# Altium PCB chip.PcbDoc (part 2 of 2)
Units mil, origin at the board's own origin, x right, y up, seen from the top; angles counter-clockwise.
Board outline 3130 x 2410 mil, 2 copper layers (Top Layer, Bottom Layer); 96 components, 117 nets, 462 pads, 172 vias.
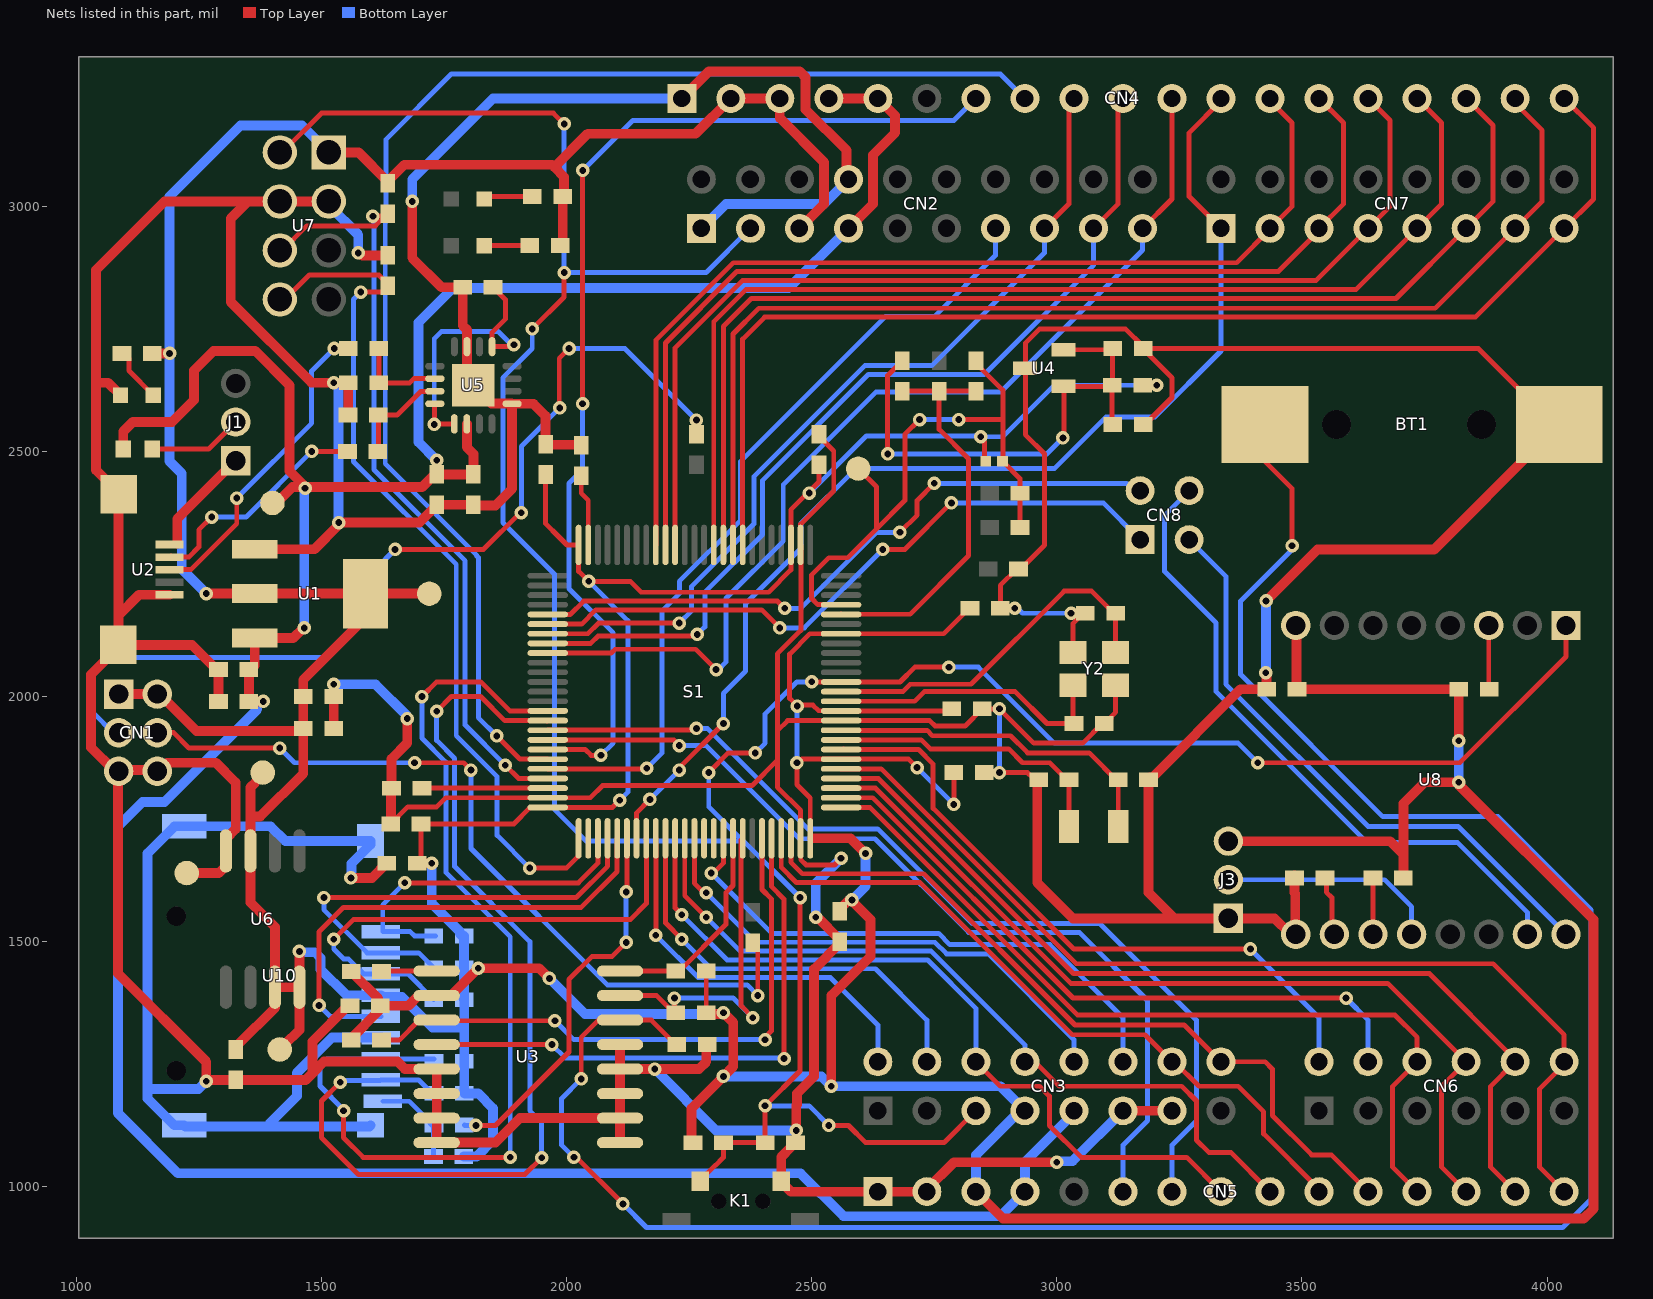
[diagram p2: the nets of this part, all layers, seen from the top]

## Via types
v1: diameter 27.56, hole 13.78, Top Layer to Bottom Layer, 172 vias

## Nets (pads, with @x,y where several pads share a name; then routed paths per layer and width w, separated by ;. In a path a pad name is that pad's centre, name@x,y a point inside that pad or via, vN(x,y) a via of type N, cw(c..) or ccw(c..) an arc to the next point about the centre after c; other vN are vias at no path point) (continued)
GND: BT1.2 C1.1 C2.2 C3.2 C4.2 C5.2 C6.1 C7.1 C8.1 C9.2 C10.1 C11.1 C12.1 C13.1 C14.2 C15.2 C16.2 C17.1 C18.2 C19.2 C20.1 C21.1 C22.1 C23.1 C24.1 C25.1 C26.1 C27.1 C28.1 C31.1 C32.2 CN1.5 CN1.6 CN2.1 CN2.8 CN3.11 CN3.13 CN4.1 CN5.1 CN5.2 J3.1 K1.D LED1.2 R15.1 R17.1 R24.2 S1.10 S1.27 S1.74 S1.99 TP6.1 U1.1 U2.5 U2.6 U2.7 U3.5 U3.6 U3.7 U3.8 U3.9 U3.10 U3.11 U3.12 U3.13 U4.3 U5.3 U5.13 U5.17 U6.4 U7.3 U7.4 U8.15 U10.6 U10.10 U10.11 U10.12 U10.13 Y2.2 Y2.4 | length 21266.3
  Top Layer w10: U6.4@1305,1665 U6.4@1305,1685 ; C23.1@1642.02,1740.92 1676.1,1775 1735,1775 1753.46,1793.46 S1.74@1961.57,1793.46 2048.46,1793.46 2073.22,1818.22 2378.22,1818.22 2430,1870 ; C19.2@1784.74,2835 C19.2@1786.9,2835 ; C10.1@1810,2390.12 C10.1@1810.12,2390 ; C6.1@2285.93,1290 C6.1@2287.01,1290 ; C22.1@2515,2535 2515,2531 2545,2501 2545,2419.37 2477.32,2351.7 S1.27@2477.32,2309.21 2478,2308.53 2478,2135.13 2430,2087.13 2430,1930 ; v1(2560,1670) 2546.45,1656.45 2488.55,1656.45 2477.67,1667.33 2477.67,1710.44 S1.99@2477.32,1710.79 2477.32,1767.68 2430,1815 2430,1870 ; C26.1@2848.1,1975 2813.1,1940 2751.74,1940 2740.8,1950.94 S1.10@2560,1950.94 2450.94,1950.94 2430,1930 ; C25.1@2852,1845 v1(2883,1845) v1@2887,1845 ; C26.1@2853.71,1975 v1(2883,1975) 2953,1905 3053,1905 3093,1945 C17.1@3097,1945 3101,1945 3111,1955 3111,1959 3120,1968 Y2.4@3120,2022.99 ; C27.1@2885,2175.5 C27.1@2885,2180 2885,2227 2918,2260 R15.1@2922,2260 2926,2260 2975,2309 2975,2495 2935.86,2534.14 2935.86,2720.86 2965,2750 3140,2750 C7.1@3175,2715 ; v1@2887,1838 v1@2887,1845 ; C27.1@2888,2180 v1(2914,2180) ; R15.1@2921.61,2255 R15.1@2926.61,2260 ; C13.1@2950,1835 2940,1845 v1@2887,1845 ; C13.1@2963,1830 C13.1@2968,1830 ; v1(3029,2170) 3053.58,2170 C20.1@3053.79,2169.79 ; Y2.2@3033.39,2090 3033.39,2149.39 C20.1@3053.79,2169.79 ; C20.1@3058,2170 3054,2170 C20.1@3053.79,2169.79 ; C20.1@3058.5,2169.75 3058,2169.75 C20.1@3053.79,2169.79 ; C7.1@3176,2710 3860,2710 4004,2566 4004,2518 BT1.2@4004,2505 ; C8.1@3180,2550 3185,2555 3185,2560 3235,2610 3235,2650 C7.1@3185,2700 ; J3.1@3347.48,1547.52 J3.1@3348.74,1546.26 ; 2430,1870 2430,1930
  Top Layer w20: U2.6@1078,2423.71 1077.28,2423.71 1059.25,2441.73 1059.25,2442.46 1040,2461.71 1040,2640 ; U2.7@1080,2095 1030,2045 1030,1896.26 CN1.5@1076.26,1850 ; U2.6@1085.67,2411.38 1085.67,2165.67 ; LED1.2@1090,2615 1065,2640 1040,2640 ; CN1.5@1091.26,1835 CN1.5@1088.74,1837.52 ; U2.5@1190,2207.64 1127.64,2207.64 1085.67,2165.67 ; TP6.1@1225,1640 1290.59,1640 1305,1654.41 U6.4@1305,1665 ; C3.2@1290,1990 C2.2@1290,2055 1286,2055 1236,2105 1235,2105 1234.72,2105.28 U2.7@1085.67,2105.28 1085.67,2165.67 ; U6.4@1305,1685 1305.92,1685.92 1305.92,1710.92 1325,1730 1325,1825 1285,1865 1185,1865 1170,1850 CN1.5@1076.26,1850 ; U1.1@1367.95,2300.55 1485.55,2300.55 1535,2350 v1(1535,2355) 1700.15,2355 C9.2@1734.75,2389.6 ; U7.3@1515,3010 U7.4@1415,3010 1350,3010 ; C5.2@1525,1935 C4.2@1525,2000 v1(1525,2025) ; C16.2@1554,2574.25 1554.5,2574.75 1554.5,2639.75 C15.2@1554.87,2640.13 ; C15.2@1555,2640.25 C15.2@1554.87,2640.13 ; C1.1@1558.23,1369.26 1554.23,1369.26 1481.5,1296.53 1481.5,1231.5 ; v1(1560,1630) 1603,1630 C21.1@1633,1660 ; v1(1575,2905) 1578.11,2905 1583.11,2900 R17.1@1635,2900 ; C23.1@1641.1,1740 1642.02,1740.92 1642.02,1812.23 C18.2@1642.95,1813.15 1642.95,1872.95 1675,1905 v1(1675,1955) ; v1(1685,3010) 1685,2895 1745,2835 C19.2@1788,2835 1788,2757.06 1796.8,2748.26 U5.3@1796.8,2713.74 1796.8,2648.2 U5.17@1810,2635 1847.09,2597.91 1888.03,2597.91 U5.13@1888.74,2597.2 ; C9.2@1735,2391.1 1809.02,2391.1 C10.1@1810,2390.12 ; C10.1@1809.88,2391.1 1809.88,2395.1 1814.98,2390 1855,2390 1888.74,2423.74 U5.13@1888.74,2597.2 ; C14.2@2030,2512.5 2028.81,2513.69 1958.49,2513.69 C28.1@1957.3,2514.88 1957.3,2572.7 1932.8,2597.2 U5.13@1888.74,2597.2 ; U3.9@2109.04,1090 U3.10@2109.04,1140 ; U3.13@2109.04,1290 U3.12@2109.04,1240 ; CN4.1@2235,3215.06 CN4.1@2235,3220 2290,3275 2475.76,3275 2487.47,3263.28 2487.47,3197.79 2570.73,3114.53 2570.73,3059.27 CN2.8@2575,3055 ; C6.1@2285.93,1290 2285,1289.07 2285,1255 2270,1240 v1(2180,1240) U3.12@2109.04,1240 ; C31.1@2458,1081.07 2437.96,1061.02 K1.D@2437.96,1011.34 2437.96,1009.37 2457.33,990 CN5.1@2635,990 CN5.2@2735,990 2735,995 2790,1050 v1(3000,1050) ; v1(2468.5,1115) 2468.5,1166.31 2470,1167.81 2470,1190 2505,1225 2505,1444 ; 2506.45,1445.45 2557.17,1496.17 C24.1@2557.17,1500.17 2557.17,1504.17 2511.33,1550 v1(2508.17,1550) ; C13.1@2960,1825 2960,1620.46 3032.94,1547.52 3239.76,1547.52 ; CN3.11@3135,1155 CN3.13@3235,1155 ; C11.1@3187,1830 3187,1600.28 3239.76,1547.52 ; C11.1@3190,1835 3195,1835 3375,2015 C32.2@3428,2015 3428,2047 v1(3426.38,2048.62) ; v1(3427,2195) 3532,2300 3770,2300 3988,2518 4004,2518 BT1.2@4032,2518 ; R24.2@3485,1635 R24.2@3485,1630 3485,1600 3486.26,1598.74 3486.26,1516.26 3475.44,1516.26 3444.18,1547.52 J3.1@3350,1547.52 3347.48,1547.52 3239.76,1547.52 ; 1040,2640 1040,2870 1180,3010 1350,3010 ; CN1.5@1076.26,1850 CN1.5@1088.74,1837.52 ; CN1.5@1088.74,1837.52 1085,1833.78 1085,1435 1265,1255 v1(1265,1215) 1268,1218 C12.1@1325,1218 1468,1218 1481.5,1231.5 ; 1350,3010 1315,2975 1315,2805 1479.75,2640.25 v1(1525,2640.25) 1525.13,2640.13 C15.2@1554.87,2640.13 ; 1481.5,1231.5 1505.22,1255.22 1654.78,1255.22 1670,1240 U3.5@1735,1240 U3.6@1735,1190 U3.7@1735,1140 U3.8@1735,1090 1855,1090 1905,1140 U3.10@2109.04,1140 ; U3.10@2109.04,1140 U3.11@2109.04,1190 U3.12@2109.04,1240
  Bottom Layer w10: v1(2883,1845) v1(2883,1975) ; v1@2915,2180 v1(2914,2180) 2920,2180 2930,2170 v1(3029,2170)
  Bottom Layer w20: v1(1265,1215) 1249.11,1199.11 1145.89,1199.11 1145,1200 ; 1395,1130 1450,1185 1450,1232.53 1521.75,1304.28 U10.6@1621.24,1304.28 ; U7.3@1515,3010 1515,3002.05 1575,2942.05 v1(1575,2905) ; v1(1525,2025) 1610,2025 1675,1960 v1(1675,1955) ; v1(1525,2640.25) 1535,2630.25 v1(1535,2355) ; v1(1560,1630) 1561.45,1631.45 1561.45,1659.19 1600.05,1697.8 U10.13@1600.05,1705.3 1426.3,1705.3 1396.3,1735.3 U10.12@1220.05,1735.3 1200.05,1735.3 1145,1680.25 1145,1200 ; U10.10@1600.05,1125.3 1597.97,1123.22 1222.13,1123.22 U10.11@1220.05,1125.3 1200.05,1125.3 1145,1180.35 1145,1200 ; v1(1685,3010) 1685,3055 1850,3220 CN4.1@2235,3220 ; v1(2180,1240) 2305,1115 v1(2468.5,1115) ; CN2.1@2275,2955 2325,3005 2525,3005 CN2.8@2575,3055 ; v1(2508.17,1550) 2508.17,1618.17 v1(2560,1670) ; v1(3000,1050) 3002.2,1052.2 3032.2,1052.2 CN3.11@3135,1155 ; v1(3426.38,2048.62) 3427,2049.25 v1(3427,2195)
IOREF: R9.2 R10.2 R11.2 S1.21 | length 819.8
  Top Layer w10: S1.21@2560,2168.26 2560.43,2167.83 2700.7,2167.83 2820,2287.13 2820,2485 2760,2545 R10.2@2760,2622.5 ; R11.2@2685,2623 R10.2@2760,2623 R9.2@2835,2623
MCU_RX: CN8.1 S1.56 | length 1368.8
  Top Layer w10: S1.56@1961.57,2147.8 2030.8,2147.8 2059.78,2176.78 2398.22,2176.78 v1(2435,2140) ; v1(2645,2300) 2690,2300 v1(2785,2395)
  Bottom Layer w10: v1(2435,2140) 2485,2140 v1(2645,2300) ; v1(2785,2395) 3095,2395 CN8.1@3167.5,2322.5
MCU_TX: CN8.2 S1.55 | length 1356.9
  Top Layer w10: S1.55@1961.57,2167.48 2007.48,2167.48 2034.78,2194.78 2430.22,2194.78 v1(2445,2180) ; v1(2680,2335) 2715,2370 2715,2400 v1(2750,2435)
  Bottom Layer w10: v1(2445,2180) 2477.87,2180 2632.87,2335 v1(2680,2335) ; v1(2750,2435) 3142.5,2435 3157.5,2420 3162.5,2425 CN8.2@3167.5,2420
NetBT1_1: BT1.1 C6.2 U3.14 | length 4740.5
  Top Layer w10: v1(2015,1060) 2020,1060 v1(2115,965) ; v1(2030,1220) 2030,1305 2065,1340 U3.14@2109.04,1340 2172.83,1340 2222.83,1290 C6.2@2225.01,1290 ; BT1.1@3425,2555 3425,2479 3480,2424 v1(3480,2307.5)
  Bottom Layer w10: v1(2015,1060) 1990,1085 1990,1180 v1(2030,1220) ; v1(2115,965) 2163,917 4032,917 4090,975 4090,1565 3900,1755 3665,1755 3375,2045 3375,2195 3480,2300 v1(3480,2307.5)
NetC14_1: C14.1 S1.49 | length 148.6
  Top Layer w10: C14.1@2030,2451.9 2030,2414.74 2044.25,2400.48 S1.49@2044.25,2309.21
NetC15_1: C15.1 R13.2 U5.6 | length 190.8
  Top Layer w10: R13.2@1617,2710 C15.1@1617,2640.25 1616,2639.25 1679.25,2639.25 1689.12,2649.12 1730.54,2649.12 U5.6@1731.26,2648.4
NetC16_1: C16.1 R12.2 U5.7 | length 211.3
  Top Layer w10: R12.2@1615,2500 1616,2501 C16.1@1616,2574.25 1654.25,2574.25 1702.08,2622.08 1730.54,2622.08 U5.7@1731.26,2622.8 ; R12.2@1620.12,2505.12 R12.2@1621,2504.25
NetC18_1: C18.1 S1.73 | length 259.2
  Top Layer w10: C18.1@1703.1,1815 C18.1@1704.95,1813.15 S1.73@1961.57,1813.15
NetC19_1: C19.1 U5.1 U5.8 U5.9 | length 640.4
  Top Layer w10: v1(1730,2555) v1@1730.63,2555.63 ; U5.8@1731.26,2597.2 1730.63,2596.57 v1@1730.63,2555.63 ; U5.9@1771,2569 U5.9@1771,2556.26 1770.37,2555.63 v1@1730.63,2555.63 ; C19.1@1850,2835 1875,2810 1875,2770 1848,2743 U5.1@1848,2713.74 1886.03,2713.74 1889.97,2717.68 v1(1892.68,2717.68)
  Bottom Layer w10: v1(1730,2555) 1730,2730 1745,2745 1860,2745 1884.65,2720.35 1890,2720.35 v1(1892.68,2717.68)
NetCN1_3: CN1.3 R6.1 | length 1939.8
  Top Layer w10: v1(1650,2300) 1830.32,2300 1905.32,2375 v1(1907.66,2375) ; v1(1986.25,2588.75) 1985,2590 1985,2690 v1(2005,2710) ; R6.1@2265,2535 v1(2265,2564)
  Bottom Layer w10: CN1.3@1085,1916.26 1025,1976.26 1025,2040 1065,2080 1505,2080 1610,2185 1610,2260 v1(1650,2300) ; v1(1907.66,2375) 1907.66,2510.16 v1(1986.25,2588.75) ; v1(2005,2710) 2119,2710 v1(2265,2564)
NetCN1_4: CN1.4 R5.2 | length 1658.6
  Top Layer w10: CN1.4@1165,1926.26 1198.28,1926.26 1229.54,1895 v1(1415,1895) ; v1(1690,1865) 1790,1865 v1(1805,1850) ; R5.2@2375,1493 R5.2@2377.5,1495.5 ; R5.2@2380,1498 R5.2@2377.5,1495.5 ; v1(2390,1390) 2390,1483 R5.2@2377.5,1495.5
  Bottom Layer w10: v1(1415,1895) 1445,1865 v1(1690,1865) ; v1(1805,1850) 1805,1690 2083.22,1411.78 2368.22,1411.78 v1(2390,1390)
NetF1_1: F1.1 J1.2 | length 195.2
  Top Layer w10: F1.1@1155,2505 1270,2505 J1.2@1325,2560 J1.2@1326.73,2561.73
NetJ3_2: J3.2 U8.18 | length 452.8
  Bottom Layer w10: J3.2@3350,1626.26 3668.74,1626.26 3723.74,1571.26 U8.18@3723.74,1515
NetLED1_1: LED1.1 R7.2 | length 113.9
  Top Layer w10: R7.2@1093,2700 1097,2700 1107,2690 1107,2665 LED1.1@1157,2615
NetLED2_1: LED2.1 R28.2 | length 93
  Top Layer w10: LED2.1@1832,2920 R28.2@1925,2920
NetLED3_1: LED3.1 R29.2 | length 100.1
  Top Layer w10: LED3.1@1832,3015 1837,3020 R29.2@1930,3020
NetR4_1: R4.1 U3.1 | length 112.8
  Top Layer w10: R4.1@1622.5,1439.26 1623.24,1440 U3.1@1735,1440
NetR23_2: R23.2 U8.3 | length 130.3
  Top Layer w10: U8.3@3881.22,2145 3881.22,2015.78 R23.2@3882,2015
NetR24_1: R24.1 U8.16 | length 116.7
  Top Layer w10: R24.1@3550,1625 3550,1601 3561,1590 3561,1520.26 U8.16@3566.26,1515
NetR25_1: R25.1 R26.1 U10.9 | length 188
  Bottom Layer w10: U10.9@1625.18,1174.42 1678.88,1174.42 1715.44,1137.86 1715.44,1135.95 1726.49,1124.9 1728.4,1124.9 R26.1@1728.4,1061.7
NetR27_1: R27.1 U8.17 | length 115
  Top Layer w10: U8.17@3645,1515 R27.1@3645,1630
OSC32_IN: C13.2 S1.8 Y1.1 | length 595
  Top Layer w10: S1.8@2560,1911.57 2723.43,1911.57 2741.78,1893.22 2901.78,1893.22 2930,1865 2986,1865 3021.5,1829.5 C13.2@3021.5,1826.5 ; C13.2@3021.5,1830 C13.2@3021.5,1831.5 ; Y1.1@3025,1735 C13.2@3025,1830
OSC32_OUT: C11.2 S1.9 Y1.2 | length 699.8
  Top Layer w10: S1.9@2560,1931.26 2560.35,1930.91 2735.37,1930.91 2746.28,1920 2905.51,1920 2940.51,1885 3066,1885 3125.39,1825.61 Y1.2@3125.39,1735
OSC_IN: C17.2 S1.12 Y2.3 | length 583.7
  Top Layer w10: S1.12@2560,1990.31 2710.31,1990.31 2730,2010 2915,2010 2980,1945 C17.2@3030,1945 ; Y2.3@3033.39,2022.99 3033.39,1946.61 C17.2@3035,1945
OSC_OUT: C20.2 S1.13 Y2.1 | length 743.6
  Top Layer w10: S1.13@2560,2010 2685.91,2010 2700.91,2025 2825,2025 3015,2215 3071,2215 3116,2170 C20.2@3120,2170 Y2.1@3120,2090
PA8: CN5.7 S1.67 | length 1942.1
  Top Layer w10: S1.67@1961.57,1931.26 1962.09,1931.78 2261.78,1931.78 v1(2265,1935)
  Bottom Layer w10: v1(2265,1935) 2287.13,1935 2492.13,1730 2634.54,1730 2827.54,1537 3088,1537 3285,1340 3285,1135 3235,1085 CN5.7@3235,990
PA9: CN5.6 S1.68 | length 1854.3
  Top Layer w10: S1.68@1961.57,1911.57 1961.92,1911.23 2218.77,1911.23 v1(2230,1900)
  Bottom Layer w10: v1(2230,1900) 2284.54,1900 2474.54,1710 2629.09,1710 2820.09,1519 3046,1519 3185,1380 3185,1135 3135,1085 CN5.6@3135,990
PA10: CN4.7 S1.69 | length 2229
  Top Layer w10: S1.69@1961.23,1892.24 S1.69@1961.57,1891.89 2038.11,1891.89 2050,1880 v1(2070,1880) ; v1(2032.58,2597.42) 2032.58,3072.58 v1(2033.19,3073.19)
  Bottom Layer w10: v1(2032.58,2597.42) 2032.58,2462.58 2005,2435 2005,2220 2095,2130 2095,1905 v1(2070,1880) ; v1(2033.19,3073.19) 2135,3175 2790,3175 CN4.7@2835,3220
PA11: CN4.8 S1.70 | length 2815
  Top Layer w10: v1(1857.53,1919.6) 1904.58,1872.55 1961.23,1872.55 S1.70@1961.57,1872.2
  Bottom Layer w10: v1(1857.53,1919.6) 1820,1957.13 1820,2283.63 1816,2287.63 1816,2289 1630,2475 1630,2967.13 1631.78,2968.91 1631.78,3136.78 1765,3270 2885,3270 CN4.8@2935,3220
PA12: CN2.13 S1.71 | length 1657.1
  Top Layer w10: S1.71@1961.57,1852.52 2162.52,1852.52 v1(2163.76,1853.76)
  Bottom Layer w10: v1(2163.76,1853.76) 2195,1885 2195,2175 2230,2210 2230,2235 2355,2360 2355,2480 2650,2775 2750,2775 2875,2900 CN2.13@2875,2955
PA15: S1.77
PB0: CN4.17 CN7.11 S1.35 | length 2354.3
  Top Layer w10: S1.35@2319.84,2309.21 2319.84,2754.84 2377,2812 3692,2812 CN7.11@3835,2955 3890,3010 3890,3165 CN4.17@3835,3220
PB1: CN4.16 CN7.9 S1.36 | length 2275.6
  Top Layer w10: S1.36@2300.16,2309.21 2300.16,2764.7 2365.46,2830 3610,2830 CN7.9@3735,2955 3785,3005 3785,3170 CN4.16@3735,3220
PB3: S1.89
PB4: S1.90
PB5: CN3.12 S1.91 | length 1143.1
  Top Layer w10: v1(2295,1640) 2295,1635.09 2319.84,1659.93 S1.91@2319.84,1710.79
  Bottom Layer w10: v1(2295,1640) 2418.22,1516.78 2758.82,1516.78 2781.6,1494 2986,1494 3135,1345 CN3.12@3135,1255
PC4: CN4.19 CN7.15 S1.33 | length 2504
  Top Layer w10: S1.33@2359.21,2309.21 2359.21,2729.21 2404,2774 3854,2774 CN7.15@4035,2955 4095,3015 4095,3160 CN4.19@4035,3220
PC5: CN4.18 CN7.13 S1.34 | length 2425.6
  Top Layer w10: S1.34@2339.53,2309.21 2339.53,2739.53 2392,2792 3772,2792 CN7.13@3935,2955 3990,3010 3990,3155 3935,3210 CN4.18@3935,3220
PC13: CN6.2 S1.7 | length 1339.7
  Top Layer w10: S1.7@2565,1892.67 2565.78,1891.89 2718.11,1891.89 2747.77,1862.23 2747.77,1772.03 3034.8,1485 v1(3395,1485)
  Bottom Layer w10: v1(3395,1485) 3535,1345 CN6.2@3535,1255
PD1: CN4.12 CN7.1 S1.82 | length 2353
  Top Layer w10: S1.82@2142.68,1710.79 2143.02,1711.13 2143.02,1763.02 v1(2170,1790) ; v1(2230,1850) 2230,1855 v1(2320,1945) ; CN7.1@3335,2955 3270,3020 3270,3150 3335,3215 CN4.12@3335,3220
  Bottom Layer w10: v1(2170,1790) v1(2230,1850) ; v1(2320,1945) 2320,2006.67 2365,2051.67 2365,2189.09 2478,2302.09 2478,2353.46 2589.54,2465 2995,2465 3100,2570 3200,2570 3335,2705 CN7.1@3335,2955
PD3: CN3.2 S1.84 | length 796.6
  Top Layer w10: v1(2182.05,1512.95) S1.84@2182.05,1710.79
  Bottom Layer w10: v1(2182.05,1512.95) 2268.22,1426.78 2538.22,1426.78 2635,1330 CN3.2@2635,1260
PD4: CN3.4 S1.85 | length 872.9
  Top Layer w10: S1.85@2201.73,1710.79 2201.73,1538.27 v1(2235,1505)
  Bottom Layer w10: v1(2235,1505) 2295.22,1444.78 2630.22,1444.78 2735,1340 CN3.4@2735,1255
PD5: CN3.6 CN5.8 S1.86 | length 1594.5
  Top Layer w10: S1.86@2221.42,1710.79 2221.42,1568.58 v1(2235,1555) ; CN3.6@2835,1255 2885,1205 2965,1205 2985,1185 2985,1125 3050,1060 3265,1060 CN5.8@3335,990
  Bottom Layer w10: v1(2235,1555) 2327.22,1462.78 2736.31,1462.78 2835,1364.09 CN3.6@2835,1255
PD6: CN3.8 CN5.9 S1.87 | length 1633
  Top Layer w10: S1.87@2241.1,1710.79 2241.1,1593.9 v1(2285,1550) ; CN3.8@2935,1255 2955,1255 3005,1205 3255,1205 3285,1175 3285,1095 3310,1070 3355,1070 CN5.9@3435,990 ; CN5.9@3430,970 CN5.9@3435,970
  Bottom Layer w10: v1(2285,1550) 2354.22,1480.78 2743.76,1480.78 2935,1289.54 CN3.8@2935,1255
PD7: CN3.10 S1.88 | length 1043
  Top Layer w10: S1.88@2260.79,1710.79 2260.79,1619.21 2280,1600 v1(2285,1600)
  Bottom Layer w10: v1(2285,1600) 2386.22,1498.78 2751.36,1498.78 2775.14,1475 2860,1475 3035,1300 CN3.10@3035,1255
PD10: CN2.15 CN4.9 S1.57 | length 1761
  Top Layer w10: S1.57@1961.57,2128.11 2043.51,2128.11 2065.4,2150 v1(2230,2150) ; CN2.15@2975,2955 3025,3005 3025,3210 CN4.9@3035,3220
  Bottom Layer w10: v1(2230,2150) 2255,2175 2255,2225 2382,2352 2382,2448.67 2608.33,2675 2745,2675 2975,2905 CN2.15@2975,2955
PD11: CN2.17 CN4.10 S1.58 | length 1904
  Top Layer w10: S1.58@1961.57,2108.43 2049.28,2108.43 2064.08,2123.22 2263.22,2123.22 v1(2266.61,2126.61) ; CN2.17@3075,2955 3125,3005 3125,3210 CN4.10@3135,3220
  Bottom Layer w10: v1(2266.61,2126.61) 2282.14,2142.14 2282.14,2212.6 2400,2330.46 2400,2441.22 2615.78,2657 2852,2657 3075,2880 CN2.17@3075,2955
PD12: CN2.19 CN4.11 S1.59 | length 2066
  Top Layer w10: S1.59@1961.57,2088.74 2091.21,2088.74 2099.03,2096.56 2263.44,2096.56 v1(2305,2055) ; CN2.19@3175,2955 3235,3015 CN4.11@3235,3220
  Bottom Layer w10: v1(2305,2055) 2310,2055 2325,2070 2325,2200 2442,2317 2442,2432.3 2630.7,2621 2885.09,2621 3175,2910.91 CN2.19@3175,2955
PE0: CN3.14 CN5.10 S1.97 | length 1459.6
  Top Layer w10: S1.97@2437.95,1710.79 2437.95,1651.59 2469.09,1620.45 2721.16,1620.45 3031.61,1310 3180,1310 CN3.14@3235,1255 3240,1255 3290,1205 3370,1205 3422,1153 3422,1108 3535,995 CN5.10@3535,990
PE1: CN3.16 CN5.11 S1.98 | length 1560.2
  Top Layer w10: S1.98@2457.64,1710.79 2457.64,1661.91 2481.09,1638.45 2728.61,1638.45 3037.06,1330 3260,1330 CN3.16@3335,1255 3425,1255 3440,1240 3440,1145 3520,1065 3560,1065 CN5.11@3635,990
PE2: CN5.12 CN6.6 S1.1 | length 1744
  Top Layer w10: S1.1@2560,1773.78 2618.74,1773.78 3042.52,1350 3690,1350 3735,1305 CN6.6@3735,1255 3685,1205 3685,1040 CN5.12@3735,990 ; CN6.6@3717,1255 CN6.6@3730,1268
PE3: CN6.4 S1.2 | length 1347.8
  Top Layer w10: S1.2@2560,1793.46 2624.51,1793.46 3032.98,1385 v1(3590,1385)
  Bottom Layer w10: v1(3590,1385) 3635,1340 CN6.4@3635,1255
PE4: CN5.13 CN6.8 S1.3 | length 1812.6
  Top Layer w10: S1.3@2560,1813.15 2630.28,1813.15 3028.43,1415 3675,1415 CN6.8@3835,1255 3785,1205 3785,1040 CN5.13@3835,990
PE5: CN5.14 CN6.10 S1.4 | length 1925.2
  Top Layer w10: S1.4@2560,1832.83 2636.05,1832.83 3033.89,1435 3760,1435 3932.5,1262.5 CN6.10@3932.5,1252.5 ; CN5.14@3935,990 3885,1040 3885,1205 CN6.10@3932.5,1252.5 ; CN6.10@3935,1255 CN6.10@3932.5,1252.5
PE6: CN5.15 CN6.12 S1.5 | length 2061.1
  Top Layer w10: S1.5@2560,1852.52 2641.82,1852.52 3039.34,1455 3890,1455 4035,1310 CN6.12@4035,1255 4035,1250 3985,1200 3985,1040 CN5.15@4035,990
PE9: CN4.15 CN7.7 S1.40 | length 2219
  Top Layer w10: S1.40@2221.42,2309.21 2221.42,2711.42 2359,2849 3529,2849 CN7.7@3635,2955 3680,3000 3680,3175 CN4.15@3635,3220
PE10: CN4.14 CN7.5 S1.41 | length 2151.5
  Top Layer w10: S1.41@2201.73,2309.21 2201.73,2721.28 2347.46,2867 3452,2867 3535,2950 CN7.5@3535,2955 3585,3005 3585,3170 CN4.14@3535,3220
PE11: CN4.13 CN7.3 S1.42 | length 2071.6
  Top Layer w10: S1.42@2182.05,2309.21 2182.05,2727.05 2340,2885 3367.07,2885 3437.07,2955 CN7.3@3435,2955 3480,3000 3480,3170 3435,3215 CN4.13@3435,3220
REF2.5V: C7.2 C8.2 R8.2 R11.1 U4.1 U4.2 | length 1029.9
  Top Layer w10: v1(2655,2495) 2655,2655 R11.1@2680,2680 ; v1(3012.5,2527.5) 3015,2530 U4.1@3015,2632.6 ; U4.1@3013.74,2632.6 U4.1@3015,2632.6 ; U4.2@3013.74,2707.4 3111.4,2707.4 C7.2@3114,2710 3114,2636 R8.2@3113,2635 ; C8.2@3114,2555 3113,2556 R8.2@3113,2635 ; U4.1@3015,2632.6 3110.6,2632.6 R8.2@3113,2635
  Bottom Layer w10: v1(2655,2495) 2980,2495 v1(3012.5,2527.5)
REST: C31.2 CN2.3 CN3.5 K1.C R14.2 S1.14 U7.2 U8.1 | length 6605.7
  Top Layer w10: U7.2@1415,3110 1420,3110 1500,3190 1973,3190 v1(1995,3168) ; v1(1930,2750) 1995,2815 v1(1995,2865) ; K1.C@2272.04,1001.34 K1.C@2272.04,1021.04 ; K1.C@2272.6,1011.34 2272.6,1013.31 2302.31,1043.01 2303.01,1043.01 2320,1060 R14.2@2320,1090 C31.2@2405,1090 2405.18,1090.18 2405,1090.36 v1(2405,1165) 2476.25,1236.25 v1(2476.25,1590) ; v1(2290,1845) 2330,1885 v1(2385,1885) ; v1(2500,2030) 2500.16,2029.84 2559.84,2029.84 S1.14@2560,2029.68 2680.14,2029.68 2710.46,2060 v1(2780,2060) ; v1(2535,1125) 2575,1125 2610,1090 2770,1090 CN3.5@2835,1155 ; v1(3410,1865) 3822.13,1865 4038.7,2081.57 U8.1@4038.7,2145
  Bottom Layer w10: v1(1930,2750) 1930,2710 1870,2650 1870,2355 1975,2250 1975,1770 2040,1705 2360,1705 ; v1(1995,3168) v1(1995,2865) 2285,2865 CN2.3@2375,2955 ; v1(2290,1845) 2290,1775 2360,1705 ; v1(2385,1885) 2405,1905 2405,1965 2470,2030 v1(2500,2030) ; v1(2405,1165) 2495,1165 v1(2535,1125) ; v1(2476.25,1590) 2361.25,1705 2360,1705 ; v1(2780,2060) 2840,2060 2995,1905 3370,1905 v1(3410,1865)
RTC_INT: R3.1 S1.95 U3.3 | length 1240
  Top Layer w10: R3.1@1622.5,1299.26 1658.3,1299.26 1699.05,1340 U3.3@1735,1340 1736.33,1338.67 v1(1976.33,1338.67) ; S1.95@2398.58,1710.79 2398.58,1606.42 2417.78,1587.22 2417.78,1317.78 2405,1305 v1(2405,1300)
  Bottom Layer w10: v1(1976.33,1338.67) 2015,1300 v1(2405,1300)
RTC_RST: S1.96 U3.4 | length 1184.5
  Top Layer w10: U3.4@1735,1290 1740,1285 1745,1290 v1(1970,1290) ; S1.96@2418.27,1710.79 2418.27,1612.19 2443.61,1586.85 v1(2443.61,1261.39)
  Bottom Layer w10: v1(1970,1290) 1997.22,1262.78 2442.22,1262.78 v1(2443.61,1261.39)
RTC_SCL: R1.1 S1.92 U3.16 | length 437.1
  Top Layer w10: U3.16@2109.04,1440 R1.1@2223,1440 2230,1440 2325,1535 2325,1600 2339.53,1614.53 S1.92@2339.53,1710.79
RTC_SDA: R2.1 S1.93 U3.15 | length 715
  Top Layer w10: U3.15@2109.04,1390 2184,1390 2219,1355 R2.1@2223,1355 2225,1357 2220,1362 v1(2220,1385) ; S1.93@2359.21,1710.79 2356,1707.58 2356,1369 v1(2380,1345)
  Bottom Layer w10: v1(2220,1385) 2340,1385 v1(2380,1345)
SD_DET: R25.2 S1.81 | length 784.7
  Top Layer w10: v1(1815,1125) 1855,1125 2005,1275 2005,1422.97 2052.03,1470 2092.99,1470 v1(2121.5,1498.5) ; v1(2121.5,1601.5) 2122.99,1602.99 S1.81@2122.99,1710.79
  Bottom Layer w10: R25.2@1791.44,1125.95 1792.39,1125 v1(1815,1125) ; v1(2121.5,1498.5) v1(2121.5,1601.5)
SDIO_CK: S1.80 U10.5 | length 1012.4
  Top Layer w10: v1(1495,1370) 1495,1520 1545,1570 2030,1570 2102.96,1642.96 2102.96,1710.44 S1.80@2103.31,1710.79
  Bottom Layer w10: v1(1495,1370) 1517.48,1347.52 U10.5@1621.24,1347.52
SDIO_CMD: R20.1 S1.83 U10.3 | length 1068.1
  Top Layer w10: v1(1525,1505) 1565,1545 2130,1545 2163,1578 2163,1710.15 S1.83@2162.36,1710.79
  Bottom Layer w10: v1(1525,1505) 1525,1485 1545,1465 1555,1465 1585.94,1434.06 U10.3@1621.24,1434.06 1676.64,1434.06 R20.1@1729,1381.7
SDIO_D0: R21.1 S1.65 U10.7 | length 2054.7
  Top Layer w10: v1(1545,1155) 1545,1100 1585,1060 v1(1885,1060) ; v1(1705,2000) 1735,2030 1825,2030 1884.37,1970.63 S1.65@1961.57,1970.63
  Bottom Layer w10: v1(1545,1155) 1545,1157.47 1497,1205.47 1497,1247 1511.11,1261.11 U10.7@1621.24,1261.11 U10.7@1646.83,1261.11 ; 1661.99,1260.95 R21.1@1729.44,1260.95 ; v1(1705,2000) 1705,1915 1753.75,1866.25 1753.75,1641.25 1885,1510 v1(1885,1060)
SDIO_D1: R22.1 S1.66 U10.8 | length 2085.4
  Top Layer w10: v1(1538.22,1213.22) 1500,1175 1500,1100 1575,1025 1915,1025 v1(1949.24,1059.24) ; v1(1735,1970) 1765,2000 1825,2000 1874.06,1950.94 1959.22,1950.94 S1.66@1960,1950.17
  Bottom Layer w10: v1(1538.22,1213.22) 1541.44,1216.44 1619.8,1216.44 U10.8@1621.24,1217.88 1698.52,1217.88 1725.44,1190.95 R22.1@1729.44,1190.95 ; v1(1735,1970) 1735,1910.46 1771.75,1873.71 1771.75,1653.25 1925,1500 1925,1155 1949.24,1130.76 v1(1949.24,1059.24)
SDIO_D2: R18.1 S1.78 U10.1 | length 691.1
  Top Layer w10: v1(1670,1620) 2024.01,1620 2063.94,1659.93 S1.78@2063.94,1710.79
  Bottom Layer w10: v1(1670,1620) 1625,1575 1625,1520.52 1680.9,1520.52 1689.72,1511.7 R18.1@1729,1511.7 R18.1@1733,1511.7
SDIO_D3: R19.1 S1.79 U10.2 | length 959.7
  Top Layer w10: v1(1505,1590) 2019.46,1590 2083.62,1654.16 S1.79@2083.62,1710.79
  Bottom Layer w10: v1(1505,1590) 1505,1565.22 1593,1477.23 U10.2@1621.17,1477.23 1698.47,1477.23 R19.1@1729,1446.7
TCK/SWCLK: R17.2 S1.76 U7.8 | length 1804.6
  Top Layer w10: U7.8@1415,2810 1425,2810 1475,2860 1617,2860 1635,2842 R17.2@1635,2838 1643,2830 1638,2825 v1(1580,2825) ; v1(1925,1650) 1999.64,1650 2024.57,1674.92 S1.76@2024.57,1710.79
  Bottom Layer w10: v1(1580,2825) 1565,2810 1565,2479.54 1775,2269.54 1775,1920 1858.22,1836.78 1858.22,1716.78 v1(1925,1650)
TMS/SWDIO: R16.1 S1.72 U7.6 | length 1600.7
  Top Layer w10: U7.6@1415,2910 1420,2910 1470,2960 1610,2960 R16.1@1630,2980 ; v1(1605,2980) R16.1@1630,2980 ; R16.1@1635,2985 R16.1@1630,2980 ; v1(1875,1860) 1902.17,1832.83 S1.72@1961.57,1832.83
  Bottom Layer w10: v1@1605,2975 1606.78,2973.22 1606.78,2463.22 1793,2277 1793,1942 v1(1875,1860)
U5V: J1.1 U2.1 | length 219.5
  Top Layer w10: U2.1@1169.72,2309.72 U2.1@1170.33,2310.33
  Top Layer w20: U2.1@1205.63,2312.13 1205.63,2361.89 J1.1@1325,2481.26
USB_DM: R12.1 U2.2 | length 476.9
  Top Layer w10: U2.2@1192.87,2287.28 U2.2@1190,2284.41 1229.41,2284.41 1250,2305 1250,2340 v1(1276.25,2366.25) ; v1(1480,2500) R12.1@1553,2500
  Bottom Layer w10: v1(1276.25,2366.25) 1346.25,2366.25 v1(1480,2500)
USB_DP: R13.1 U2.3 | length 644.8
  Top Layer w10: U2.3@1190,2258.82 1233.43,2258.82 1327.12,2352.51 v1(1327.12,2405) ; v1(1526,2710) R13.1@1555,2710
  Bottom Layer w10: v1(1327.12,2405) 1480,2557.88 1480,2664 v1(1526,2710)
VCC3.3: C1.2 C4.1 C5.1 C12.2 C21.2 C22.2 C23.2 C24.2 C25.2 C26.2 C27.2 C28.2 C32.1 CN1.1 CN1.2 CN2.5 CN3.7 CN4.2 CN4.3 CN5.3 J3.3 L1.1 R1.2 R2.2 R3.2 R4.2 R7.1 R8.1 R14.1 R16.2 R18.2 R19.2 R20.2 R21.2 R22.2 R23.1 R26.2 R27.2 R28.1 R29.1 S1.6 S1.11 S1.19 S1.28 S1.50 S1.75 S1.100 TP2.1 TP4.1 TP5.1 U1.2 U1.4 U3.2 U6.3 U6.7 U6.8 U7.1 U8.8 U10.4 | length 17113.8
  Top Layer w10: C12.2@1325,1290 C12.2@1325,1292.17 ; TP4.1@1420,1285 TP4.1@1425,1280 ; U3.2@1699.05,1390 U3.2@1735,1390 ; C21.2@1703.1,1665 C23.2@1703.1,1740 1892.36,1740 1926.14,1773.78 S1.75@1961.57,1773.78 2093.78,1773.78 v1(2108.39,1788.39) ; C28.2@1957.3,2451.79 1957.3,2352.7 1983.54,2326.46 2000.79,2309.21 S1.50@2024.57,2309.21 2024.57,2255.43 v1(2045,2235) 2130,2235 2152.22,2212.78 2412.06,2212.78 2457.64,2258.36 S1.28@2457.64,2309.21 2457.64,2381.12 2515,2438.48 C22.2@2515,2473 ; R2.2@2285,1355 R1.2@2285,1440 ; v1(2470,1865) 2470,1820 2497.01,1792.99 S1.100@2497.01,1710.79 ; v1@2479.91,1872.2 S1.6@2560,1872.2 2697.8,1872.2 v1(2715,1855) ; C26.2@2785,1980 2775.63,1970.63 S1.11@2560,1970.63 2559.65,1970.98 2514.02,1970.98 2502.46,1982.54 2472.54,1982.54 v1(2470.62,1980.62) 2455,1996.25 2455,2086.67 2496.44,2128.11 S1.19@2560,2128.11 2769.36,2128.11 C27.2@2821.5,2180.25 ; v1(2790,1780) C25.2@2790,1845 ; v1@2845,2527.95 2852.36,2520.6 L1.1@2852.36,2480 ; R8.1@3175.49,2635 v1(3204,2635)
  Top Layer w20: CN1.1@1086.26,2005 CN1.2@1165,2005 ; R7.1@1162,2700 v1(1190,2700) ; CN1.2@1163.74,1995 1180,1995 1245,1930 1454,1930 1459,1935 1463,1931 1463,1843 1375,1755 1355,1755 ; v1(1265,2210) U1.2@1364.02,2210 1367.95,2210 U1.4@1590,2210 TP2.1@1720,2210 ; C12.2@1325,1280 1330,1285 1330,1290 1405,1365 U6.7@1405,1407.05 ; 1365,1825 1355,1815 1355,1755 ; TP4.1@1415,1290 1415.2,1289.8 1424.8,1289.8 1455,1320 U6.8@1455,1407.05 ; v1(1455,1480) U6.8@1455,1407.05 ; C5.1@1463,1935 C4.1@1463,2000 1463,2034.38 1590,2161.38 U1.4@1590,2205 ; U7.1@1515,3110 1576,3110 R16.2@1635,3051 ; R3.2@1560.5,1299.26 1564.5,1299.26 1560.87,1302.89 1616.23,1358.25 C1.2@1616.23,1369.26 ; R4.2@1560.5,1439.26 1615.97,1383.79 1615.97,1369.51 C1.2@1616.23,1369.26 ; R16.2@1638,3047 R16.2@1635,3047 R16.2@1635,3051 ; C21.2@1695,1660 v1(1725,1660) ; U3.2@1699.05,1390 1698.34,1390 1677.6,1369.26 C1.2@1620.23,1369.26 C1.2@1616.23,1369.26 ; U3.2@1735,1390 1764.16,1390 v1(1820,1445.84) 1944.16,1445.84 v1(1965,1425) ; R28.1@1992,2920 R29.1@1992,3020 ; R29.1@1995,3020 1995,3060 1975,3080 ; R14.1@2255,1100 2255,1160 v1(2320,1225) 2340,1245 2340,1335 v1(2320,1355) 2317.2,1352.2 2287.8,1352.2 R2.2@2285,1355 ; CN2.5@2475,2955 2525,3005 2525,3090 2435,3180 CN4.3@2435,3220 CN4.2@2335,3220 2263,3148 2043,3148 1975,3080 ; S1.100@2501.23,1710.79 2579.21,1710.79 v1(2610,1680) ; v1(2540,1205) 2540,1390 2620,1470 2620,1544.97 v1@2581.07,1583.9 ; C24.2@2557.17,1562.17 2557.17,1566.17 2573.8,1582.8 2579.97,1582.8 v1@2581.07,1583.9 ; v1(2582.17,1585) v1@2581.07,1583.9 ; CN5.3@2835,990 2890,935 4074.99,935 4095,955.01 4095,1545 3820,1820 v1(3820,1825) 3750,1825 3707,1782 3707,1678.14 ; v1@2845,2527.95 v1(2845,2530) ; J3.3@3350,1710 J3.3@3350,1705 3680.14,1705 3707,1678.14 ; U8.8@3487.52,2145 3488.76,2143.76 3488.76,2016.24 C32.1@3490,2015 R23.1@3815,2015 ; R27.2@3707,1630 3707,1678.14 ; v1(3820,1910) 3820,2010 R23.1@3815,2015 ; R23.1@3820,2015 R23.1@3815,2015 ; 1355,1755 U6.3@1355,1685 1355,1580 1405,1530 U6.7@1405,1407.05 ; U6.7@1405,1407.05 U6.8@1455,1407.05 ; R16.2@1635,3051 1669,3085 1970,3085 1975,3080
  Bottom Layer w10: v1(2045,2235) 2125,2155 2125,1805 v1(2108.39,1788.39) ; v1(2470,1865) 2470,1980 v1(2470.62,1980.62) ; v1(2495,2415) 2611.78,2531.78 2843.22,2531.78 v1(2845,2530) 2890,2530 2995,2635 v1(3204,2635) ; v1(2715,1855) v1(2790,1780)
  Bottom Layer w20: v1(1265,2210) 1215,2260 1215,2455 1190,2480 v1(1190,2700) 1190,3020 1335,3165 1460,3165 U7.1@1515,3110 ; v1(1455,1480) 1456.45,1478.55 1486.45,1478.55 1498.16,1466.84 1498.16,1443.5 1550.88,1390.78 U10.4@1621.24,1390.78 1625.02,1387 1664.24,1387 1726.24,1325 1791.22,1325 ; v1(1725,1660) 1725,1577.7 1782,1520.7 1782,1516.7 1787,1511.7 R18.2@1791,1511.7 R19.2@1791,1446.7 R20.2@1791,1381.7 1791.22,1381.47 1791.22,1325 ; R26.2@1790.4,1061.7 1816.7,1061.7 1850,1095 1850,1160 1820,1190 1792.39,1190 R22.2@1791.44,1190.95 R21.2@1791.44,1255.95 1791.22,1256.17 1791.22,1325 ; v1(1965,1425) 2037.78,1352.22 2317.22,1352.22 v1(2320,1355) ; v1(2320,1225) 2520,1225 v1(2540,1205) 2885,1205 CN3.7@2935,1155 2925,1155 2835,1065 CN5.3@2835,990 ; v1(2582.17,1585) 2610,1612.83 v1(2610,1680) ; v1(3820,1825) v1(3820,1910)
VCC3.3A: C29.2 C30.2 L1.2 R9.1 S1.22 TP7.1 | length 1234.6
  Top Layer w10: S1.22@2560,2187.17 2559.65,2187.51 2512.49,2187.51 2500,2200 2500,2248.39 2534.83,2283.22 2573.22,2283.22 2632.5,2342.5 ; TP7.1@2595,2465 2632.5,2427.5 2632.5,2342.5 ; v1(2720,2565) 2690,2535 2690,2400 2632.5,2342.5 ; v1(2800,2565) 2890,2565 ; R9.1@2835,2680 2890,2625 2890,2565 ; C30.2@2925,2335 C30.2@2925,2345 C29.2@2925,2415 2925,2444.59 2889.59,2480 2890,2480.41 2890,2565
  Bottom Layer w10: v1(2720,2565) v1(2800,2565)
VCC5V: C2.1 C3.1 C9.1 C10.2 CN2.7 CN3.9 CN4.4 CN4.5 CN5.4 F1.2 TP1.1 U1.3 U5.10 | length 6644.8
  Top Layer w20: F1.2@1095.69,2505 1095.69,2540.69 1115,2560 1195,2560 1240,2605 1240,2665 1280,2705 1365,2705 1435,2635 1435,2460 v1@1467.53,2427.47 ; U1.3@1364.02,2119.45 U1.3@1364.02,2115.51 ; v1(1381,1990) 1354.11,1990 1353.06,1988.94 C3.1@1352,1990 C2.1@1352,2055 1356,2055 1364.02,2063.02 U1.3@1364.02,2115.51 ; TP1.1@1400,2395 1408.12,2395 1440.59,2427.47 v1@1467.53,2427.47 ; v1(1465,2140) 1462.95,2140 1442.4,2119.45 1367.95,2119.45 U1.3@1364.02,2115.51 ; C9.1@1734.75,2452.59 C9.1@1730.69,2452.59 ; C9.1@1735,2457.1 C9.1@1735,2453.1 ; U5.10@1796.6,2556.26 1796.6,2508.4 1810,2495 1810,2453.21 C10.2@1809.88,2453.1 C9.1@1735,2453.1 ; CN4.4@2535,3220 CN4.5@2635,3220 2670,3185 2670,3150 2625,3105 2625,3005 CN2.7@2575,2955 ; v1@1467.53,2427.47 1705.57,2427.47 C9.1@1730.69,2452.59 ; C9.1@1730.69,2452.59 1733.1,2455 C9.1@1735,2453.1
  Bottom Layer w20: 1369,1973.94 1180.06,1785 1135,1785 1085,1735 1085,1150 1207.54,1027.46 2477.54,1027.46 2565,940 2885,940 CN5.4@2935,990 2935,1050.4 3035,1150.4 CN3.9@3035,1155 ; v1(1465,2140) v1@1465,2425 ; v1(1735,2482.1) 1698.22,2518.88 1698.22,2763.22 1768.22,2833.22 2453.22,2833.22 2570,2950 CN2.7@2575,2950
  other v1: 1466.59,2425
WIFI_RX: CN8.4 U8.21 | length 1340.6
  Bottom Layer w10: CN8.4@3270,2420 3220,2370 3220,2255 3325,2150 3325,2010 3633,1702 3818,1702 3959.96,1560.04 U8.21@3959.96,1515
WIFI_TX: CN8.3 U8.22 | length 1231
  Bottom Layer w10: CN8.3@3270,2320 3345,2245 3345,2025 3635,1735 3818.7,1735 U8.22@4038.7,1515
pads on no net: BT1. CN2.9 CN3.1 CN3.3 CN3.15 CN4.6 K1. K1.A K1.B U2.4 U5.4 U5.5 U5.11 U5.12 U5.14 U5.16 U7.5 U7.7 U8.2 U8.4 U8.5 U8.6 U8.7 U8.19 U8.20 U10.

## Keep-outs
Keep-Out Layer:
  circle w6: c1080.82,3241.81 r41.34
  circle w6: c4043.97,1706.95 r41.34
  circle w6: c1082.89,966.35 r41.34
  circle w6: c4065.42,2818.37 r41.34

## Silkscreen, mask and mechanical layers (free items; w line width, h text height)
Top Overlay:
  text "MCU_TX" at 3010,2485 h50
  text "U5V" at 1210,2465 h40
  text "WIFI_RX" at 3330,2405 h50
  text "MCU_RX" at 2985,2215 h50
  text "WIFI_TX" at 3235,2215 h50
  text "VCC3.3" at 1245,1960 h40 r90
  text "GND" at 1020,1735 h80
  text "T0102" at 1240,1005 h80
  text "MCU v1.0" at 1200,935 h80
Mechanical 1:
  the board outline again, w6